# Altium PCB AST_CONTROLLER.PcbDoc
Units mil, origin at the board's own origin, x right, y up, seen from the top; angles counter-clockwise.
Board outline 3464.57 x 2494.25 mil, 2 copper layers (Top Layer, Bottom Layer), stack 61.855 mil thick; 22 components, 31 nets, 88 pads, 9 vias.
Unrouted connection lines stored in the file: 21.
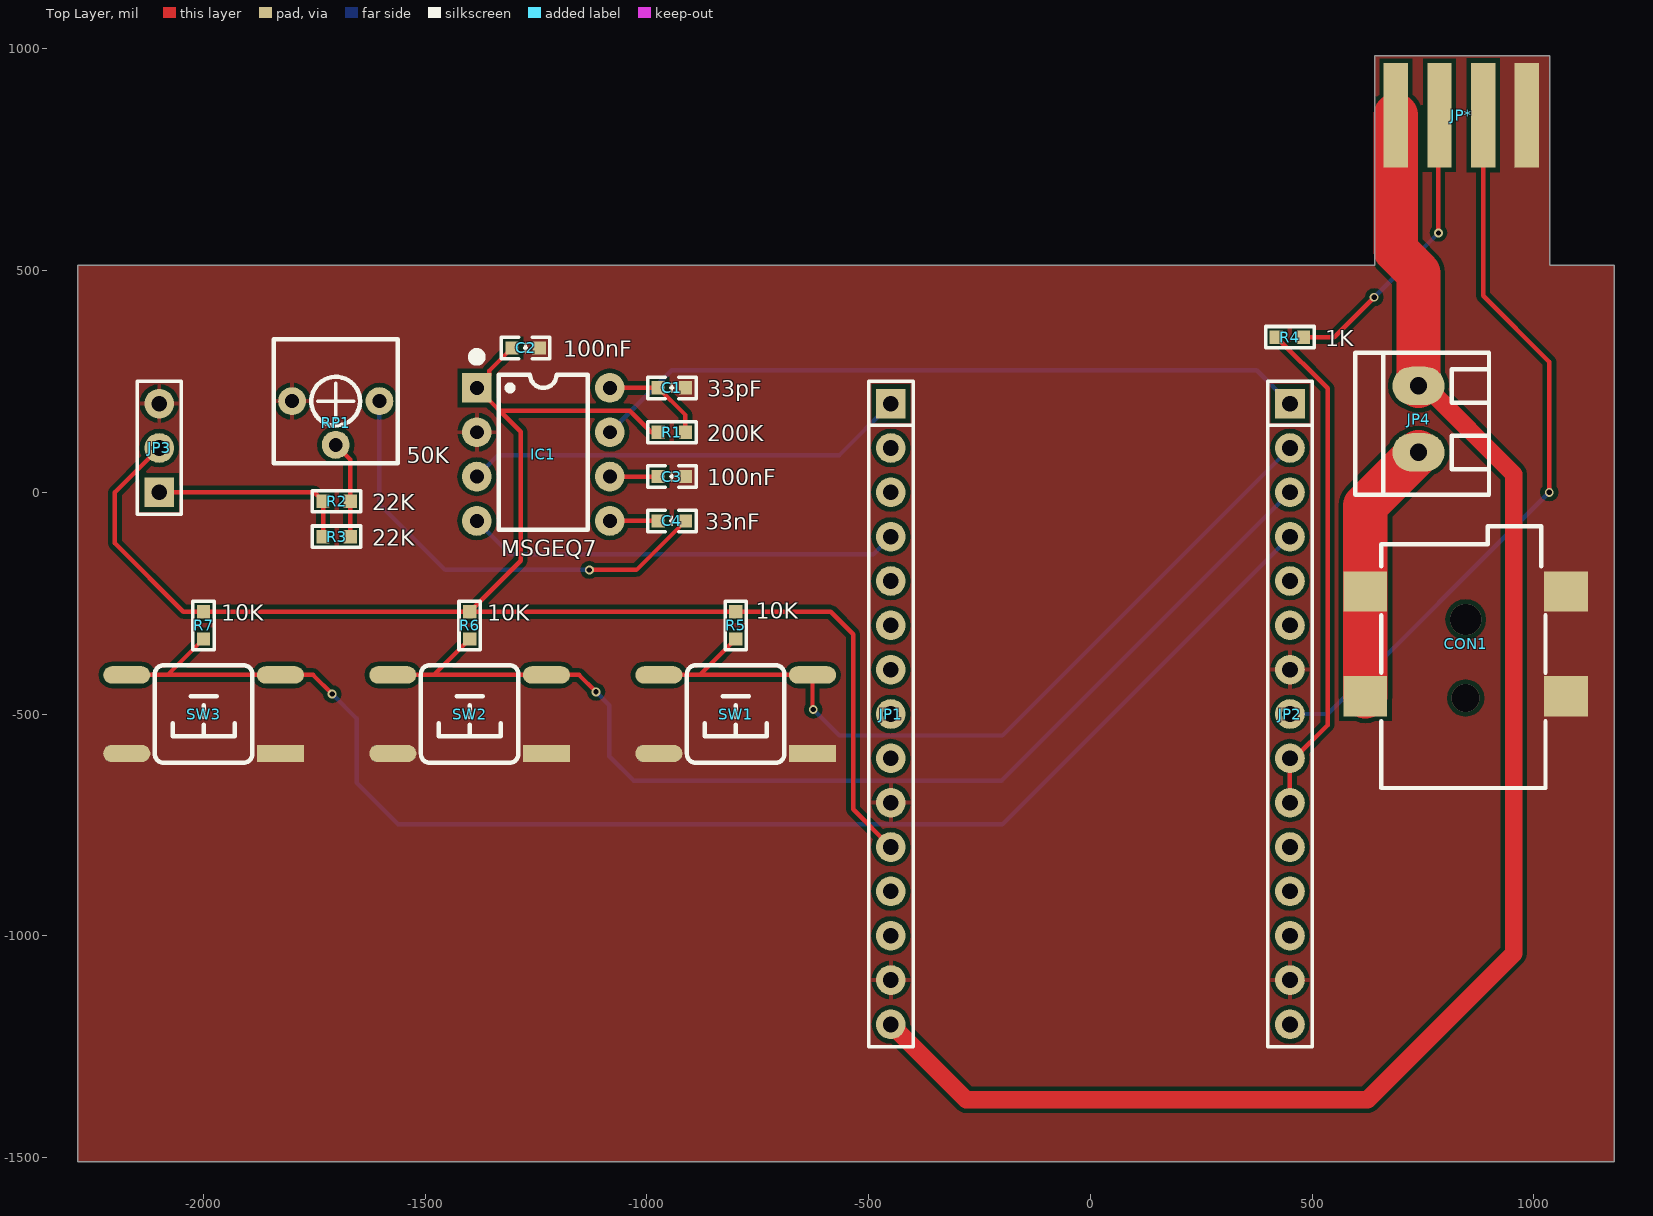
[diagram p0: Top Layer view]
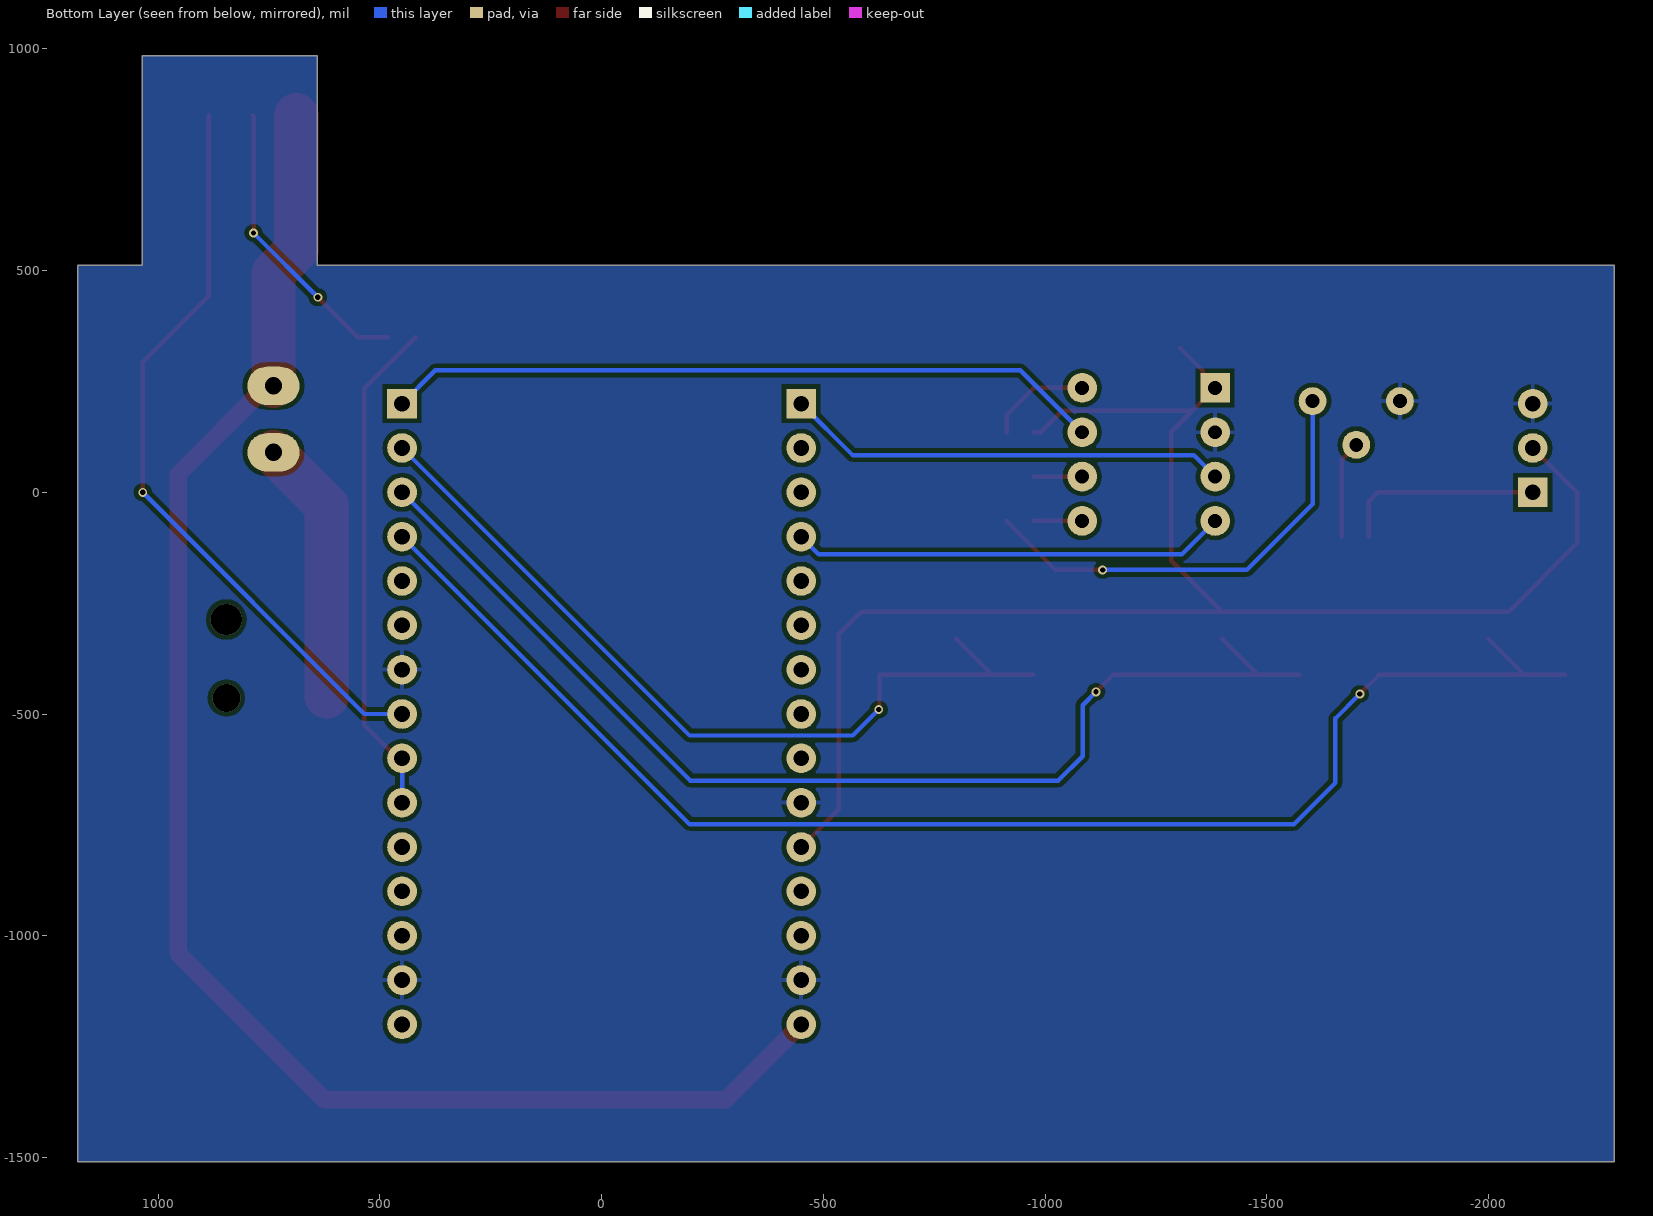
[diagram p1: Bottom Layer view, seen from below]

## Layer stack, top to bottom
Top Solder: solder mask 0.4, Solder Resist, Dk 3.5
Top Layer: signal copper 1.4
Dielectric 1: dielectric 59.0551, FR-4, Dk 4.8
Bottom Layer: signal copper 1.4
Bottom Solder: solder mask 0.4, Solder Resist, Dk 3.5

## Board outline
-2283.46,-1510 -2283.46,511.81 641.73,511.81 641.73,984.25 1035.43,984.25 1035.43,511.81 1181.1,511.81 1181.1,-1510

## Design rules (kind name [scope] priority, off if disabled: settings)
Clearance [All] p1: gap=10 ignorepadtopadclearanceinfootprint=FALSE except(0: Arc-Hole Track-Hole SMDPad-Hole THPad-Hole Via-Hole Fill-Hole Poly-Hole Region-Hole Text-Hole)
PlaneConnect [InNet('GND')] p1: planeconnectstyle=Direct reliefexpansion=20 reliefentries=4 reliefconductorwidth=10 reliefairgap=10
PolygonConnect [InNet('GND')] p1: thpad.connectstyle=Relief thpad.reliefconductorwidth=10 thpad.reliefentries=4 thpad.polygonreliefangle="90 Angle" thpad.airgapwidth=10 smdpad.connectstyle=Direct smdpad.reliefconductorwidth=10 smdpad.reliefentries=4 smdpad.polygonreliefangle="90 Angle" smdpad.airgapwidth=10 via.connectstyle=Direct via.reliefconductorwidth=10 via.reliefentries=4 via.polygonreliefangle="90 Angle" via.airgapwidth=10
RoutingVias [All] p1: holewidth=12 width=20 viastyle="Through Hole" minholewidth=12 minwidth=20 maxholewidth=28 maxwidth=50
SolderMaskExpansion [All] p1: expansion=4
Width [All] p1: maxlimit=100 minlimit=10 preferedwidth=10
29 further rules are at their usual default settings.

## Components (designator, comment, footprint, x,y, rotation, side; value= is the part's Value field where it differs from the comment)
C1 "33pF" "C 0603_L" -943.86,235.51 r180 top
C2 "100nF" "C 0603_L" -1273.86,325.51 r180 top
C3 "100nF" "C 0603_L" -943.86,35.51 r180 top
C4 "33nF" "C 0603_L" -943.86,-64.49 r180 top
CON1 "3.5*1.3" DC-050 846.38,-286.77 r90 top
IC1 "MSGEQ7" DIP8-300 -1233.86,85.51 r0 top
JP1 "HDR-1X15" HDR2.54-M-LI-15P -450,-500 r270 top
JP2 "HDR-1X15" HDR2.54-M-LI-15P 450,-500 r270 top
JP3 "HDR-1X3" HDR2.54-M-LI-3P -2100,100 r90 top
JP4 "HDR-1X2" KF128-3.81-2P 740,165 r90 top
JP* "BC-35-4P-TOUCH-FEET" BC-35-4P-TOUCH-FEET 836.61,850.39 r90 top
R1 "200K" "R 0603_L" -943.86,135.51 r180 top
R2 "22K" "R 0603_L" -1700,-20 r180 top
R3 "22K" "R 0603_L" -1700,-100 r180 top
R4 "1K" "R 0603_L" 450,350 r0 top
R5 "10K" "R 0603_L" -800,-300 r90 top
R6 "10K" "R 0603_L" -1400,-300 r90 top
R7 "10K" "R 0603_L" -2000,-300 r90 top
RP1 "50K" 3362P -1701.97,205.59 r180 top
SW1 "6x6x5" "TSW SMD-6*6*15" -800,-500 r180 top
SW2 "6x6x5" "TSW SMD-6*6*15" -1400,-500 r180 top
SW3 "6x6x5" "TSW SMD-6*6*15" -2000,-500 r180 top

## Footprints (in the part's own frame and the unit in brackets; to place one, negate y for a bottom-side part, rotate by r counter-clockwise, add the part's x,y. Pads: shape width x height; smd on the part's side, far side on the other; paste and mask are expansions set on the pad)
3362P [mm]
  round 1.6 hole 0.8: 1(-2.5,0) 2(0,2.5) 3(2.5,0)
  silkscreen extent -3.56,-3.56 3.56,3.56, body extent -3.3,-3.3 3.3,3.3, height 4.74
BC-35-4P-TOUCH-FEET [mm] "连接插片"
  rect 6x1.4 smd: 1(0,3.75) 2(0,1.25) 3(0,-1.25) 4(0,-3.75)
"C 0603_L" [mil] "无极性贴片电容"
  rect 30x30 smd: 1(-30.59,0) 2(30.59,0)
  silkscreen extent -55,-24 55,24, body extent -31,-16 31,16, height 32
DC-050 [mm] "5.5*2.1"
  rect 2.3x2.5 smd: 1(-4.4,5.75) 1(1.6,5.75) 2(1.6,-5.75) 3(-4.4,-5.75)
  silkscreen extent -9.65,-4.57 5.33,4.83, body extent -9.5,-6.3 5.3,6.3, height 11
DIP8-300 [mm] "9.4*7.6*3.8(长宽高）"
  rect 1.7x1.7 hole 0.8: 1(-3.81,3.81)
  round 1.7 hole 0.8: 2(-3.81,1.27) 3(-3.81,-1.27) 4(-3.81,-3.81) 5(3.81,-3.81) 6(3.81,-1.27) 7(3.81,1.27) 8(3.81,3.81)
  silkscreen extent -4.06,-4.32 2.54,5.84, body extent -3.93,-4.7 3.93,4.7, height 4.5
HDR2.54-M-LI-3P [mm] "排母，3脚"
  rect 1.7x1.7 hole 0.9: 1(-2.54,0)
  round 1.7 hole 0.9: 2(0,0) 3(2.54,0)
  silkscreen extent -3.81,-1.27 3.81,1.27, body extent -3.81,-1.27 3.81,1.27, height 8.5
HDR2.54-M-LI-15P [mm] "排母，15脚"
  rect 1.7x1.7 hole 0.9: 1(-17.78,0)
  round 1.7 hole 0.9: 2(-15.24,0) 3(-12.7,0) 4(-10.16,0) 5(-7.62,0) 6(-5.08,0) 7(-2.54,0) 8(0,0) 9(2.54,0) 10(5.08,0) 11(7.62,0) 12(10.16,0) 13(12.7,0) 14(15.24,0) 15(17.78,0)
  silkscreen extent -19.05,-1.27 19.05,1.27, body extent -19.05,-1.27 19.05,1.27, height 8.5
KF128-3.81-2P [mm] "螺钉式接线端子，脚距3.81mm"
  oval 2.2x3 hole 1: 1(-1.905,0) 2(1.905,0)
  silkscreen extent -4.32,-4.04 3.81,3.63, body extent -4.31,-3.9 3.81,3.5, height 8.55
"R 0603_L" [mil] "1/10W贴片电阻"
  rect 30x30 smd: 1(-30.59,0) 2(30.59,0)
  silkscreen extent -55,-24 55,24, body extent -31,-16 32,16, height 16
"TSW SMD-6*6*15" [mm] "6*6*15mm"
  rect 2.7x1 smd: 1(-4.4,2.261)
  oval 2.7x1 smd: 2(-4.4,-2.239) 3(4.4,-2.239) 4(4.4,2.261)
  silkscreen extent -2.79,-2.79 2.79,2.79, body extent -4.5,-3 4.5,3, height 14.95

## Part data
C1 C2 C3 C4: library part C, "无极性贴片电容"
CON1: library part P-DC, "低压电源接口", BOM名称=DCµ, 学习资源=www.oooc
JP1 JP2: library part "Header 15", "15P接插件", BOM名称=15P, 学习资源=www.oooc
JP3: library part "Header 3", "3P接插件", BOM名称=3P, 学习资源=www.oooc
JP4: library part "Header 2", "2P接插件"
R1 R2 R3 R4 R5 R6 R7: library part R, "贴片电阻"
RP1: library part RP-ID, "插件单联电位器"
SW1 SW2 SW3: library part "TSW SMD-6x6", "贴片6x6轻触开关", BOM名称=ÌùÆ¬6x6Ç, 学习资源=www.ooocke.
IC1: 学习资源=www.oooc

## Via types
v1: diameter 20, hole 12, Top Layer to Bottom Layer, 7 vias
v2: diameter 62.99, hole 62.99, Top Layer to Bottom Layer, 1 vias
v3: diameter 70.87, hole 70.87, Top Layer to Bottom Layer, 1 vias

## Nets (pads, with @x,y where several pads share a name; then routed paths per layer and width w, separated by ;. In a path a pad name is that pad's centre, name@x,y a point inside that pad or via, vN(x,y) a via of type N, cw(c..) or ccw(c..) an arc to the next point about the centre after c; other vN are vias at no path point)
3V3: C2.2 IC1.1 JP1.11 JP2.6 JP2.15 JP3.2 R1.2 R5.2 R6.2 R7.2 | length 3607.4
  Top Layer w10: JP3.2 -2200,0 -2200,-115 -2045.59,-269.41 R7.2 R6.2 ; -1338.35,190 IC1.1 -1355.39,263.98 -1355.39,274.57 C2.2 ; R1.2 -990.51,135.51 -1038.98,183.98 -1332.32,183.98 -1285,136.65 -1285,-154.41 R6.2 ; JP1.11 -535,-715 -535,-320 -585.59,-269.41 R5.2 R6.2
+12Vin: CON1.1 JP4.1 | length 599.7
  Top Layer w100: CON1.1@620,-460 620,-223.78 620,-30 JP4.1
A0: IC1.3 JP1.1 | length 1002
  Bottom Layer w10: IC1.3 -1335.39,83.98 -566.02,83.98 JP1.1
AudioIn: JP3.1 R2.2 R3.2 | length 457.7
  Top Layer w10: JP3.1 -1750.59,0 R2.2 R3.2
CLK: JP1.9
CMD: JP1.7
D0: IC1.7 JP2.1 | length 1622.7
  Bottom Layer w10: IC1.7 -944.37,275 375,275 JP2.1
D1: JP2.2 R5.1 SW1.2 SW1.3 | length 1908.1
  Top Layer w10: SW1.3 -881.24,-411.83 ; R5.1 -881.24,-411.83 ; v1(-625,-490) -626.77,-488.23 SW1.2 -881.24,-411.83
  Bottom Layer w10: v1(-625,-490) -566.54,-548.46 -198.46,-548.46 JP2.2
D2: JP2.3 R6.1 SW2.2 SW2.3 | length 2573.4
  Top Layer w10: SW2.3 -1481.24,-411.83 ; R6.1 -1481.24,-411.83 ; v1(-1115,-450) -1153.17,-411.83 SW2.2 -1481.24,-411.83
  Bottom Layer w10: v1(-1115,-450) -1085,-480 -1085,-595 -1030,-650 -200,-650 JP2.3
D3: JP2.4 R7.1 SW3.2 SW3.3 | length 3231.1
  Top Layer w10: SW3.3 -2081.24,-411.83 ; R7.1 -2081.24,-411.83 ; v1(-1710,-455) -1753.17,-411.83 SW3.2 -2081.24,-411.83
  Bottom Layer w10: v1(-1710,-455) -1655,-510 -1655,-655 -1561.54,-748.46 -198.46,-748.46 JP2.4
D4: JP2.5
D5: JP2.8 JP*.3 | length 1704.3
  Top Layer w10: JP*.3 885.83,443.23 1035,294.05 v1(1035,0)
  Bottom Layer w10: JP2.8 535,-500 v1(1035,0)
D6: JP2.9 JP2.10 R4.1 | length 1238.9
  Top Layer w10: R4.1 535,234.41 535,-525 460,-600 JP2.9 JP2.10
  Bottom Layer w10: JP2.10 JP2.9
D8: JP2.11
EN: JP1.12
GND: C1.1 C2.1 C3.1 CON1.2 CON1.3 IC1.2 JP1.10 JP1.14 JP2.7 JP2.14 JP3.3 JP*.4 RP1.3 SW1.1 SW1.4 SW2.1 SW2.4 SW3.1 SW3.4
NetC1_2: C1.2 IC1.8 R1.1 | length 234.8
  Top Layer w10: IC1.8 C1.2 -913.27,174.33 R1.1
NetC3_2: C3.2 IC1.6 | length 109.4
  Top Layer w10: IC1.6 C3.2
NetC4_1: C4.1 RP1.1 | length 1029.6
  Top Layer w10: v1(-1130,-175) -1023.78,-175 C4.1
  Bottom Layer w10: RP1.1 -1603.54,-26.46 -1455,-175 v1(-1130,-175)
NetC4_2: C4.2 IC1.5 | length 109.4
  Top Layer w10: IC1.5 C4.2
NetR2_1: R2.1 R3.1 RP1.2 | length 220.7
  Top Layer w10: RP1.2 -1701.97,106.53 -1669.41,73.97 R2.1 R3.1
RST: JP1.13
RSV: JP1.2 JP1.3
RX: JP2.12
SD0: JP1.8
SD1: JP1.6
SD2: JP1.5
SD3: IC1.4 JP1.4 | length 981.7
  Bottom Layer w10: IC1.4 -1308.35,-140 -490,-140 JP1.4
TX: JP2.13
U: JP*.2 R4.2 | length 668.1
  Top Layer w10: R4.2 550,350 v1(640,440) ; v1(785,585) 785,847.99 JP*.2
  Bottom Layer w10: v1(640,440) v1(785,585)
Vin: JP1.15 JP4.2 JP*.1 | length 3621.9
  Top Layer w40: JP1.15 -280,-1370 625,-1370 955,-1040 955,40.75 755.75,240 JP4.2
  Top Layer w100: JP*.1 688.98,545.43 740,494.41 JP4.2
copper on no net:
  other v2: 846.38,-463.94
  other v3: 846.38,-286.77

## Polygon pours and split planes (outlines as drawn)
GND on Top Layer "GND_L01_P002" (solid, remove dead copper, pour order 2): -2283.46,-1510 -2283.46,511.81 641.73,511.81 641.73,984.25 1035.43,984.25 1035.43,511.81 1181.1,511.81 1181.1,-1510
GND on Bottom Layer "GND_L02_P003" (solid, remove dead copper, pour order 3): -2283.46,-1510 -2283.46,511.81 641.73,511.81 641.73,984.25 1035.43,984.25 1035.43,511.81 1181.1,511.81 1181.1,-1510

## Silkscreen, mask and mechanical layers (free items; w line width, h text height)
Mechanical 1:
  the board outline again, w10